# EAGLE board JKW_DIP-VGA-v1.0 (EAGLE 6.5.0)

No outline drawn. Coordinates in mm, seen from the top.
Copper layers (1*2*15*16): Top 0.035mm / dielectric 0.2mm / Route2 0.035mm / dielectric 0.2mm / Route15 0.035mm / dielectric 0.2mm / Bottom 0.035mm
Design rules "Hampoo *": minimum track width 3mil, minimum drill 8mil, track to track 3mil, track to pad 3mil, pad to pad 3mil, via to via 3mil, smd to smd 3mil, copper to edge 10mil, drill to drill 8mil, minimum pad ring 10mil, minimum via ring 8mil, stop-mask expansion 4mil, vias tented up to drill 39mil, thermal gap 10mil

## Footprints (pad centres in the part's own frame; a part is rotated, then mirrored left to right if it is on the bottom)
SOT23-BEC = smd 1 x 1.4: 1 -0.95,-1.1; 2 0.95,-1.1; 3 0,1.1
2X20CHIP_SM = drill 1.016: AP-EINT1 36.81,21.65; AP-EINT3 39.35,21.65; BAT 3.79,41.97; CHG-IN 3.79,49.59; CSICK 39.35,16.57; CSID0 36.81,11.49; CSID1 39.35,11.49; CSID2 36.81,8.95; CSID3 39.35,8.95; CSID4 36.81,6.41; CSID5 39.35,6.41; CSID6 36.81,3.87; CSID7 39.35,3.87; CSIHSYNC 36.81,14.03; CSIPCK 36.81,16.57; CSIVSYNC 39.35,14.03; FEL 36.81,41.97; GND@1 3.79,36.89; GND@2 1.25,1.33; GND@4 39.35,24.19; GND@5 39.35,1.33; GND@6 36.81,1.33; GND@7 36.81,24.19; GND@10 3.79,47.05; HPCOM 39.35,44.51; HPL 39.35,47.05; HPR 39.35,41.97; LCD-CLK 1.25,6.41; LCD-D2 1.25,29.27; LCD-D3 3.79,26.73; LCD-D4 1.25,26.73; LCD-D5 3.79,24.19; LCD-D6 1.25,24.19; LCD-D7 3.79,21.65; LCD-D10 1.25,21.65; LCD-D11 3.79,19.11; LCD-D12 1.25,19.11; LCD-D13 3.79,16.57; LCD-D14 1.25,16.57; LCD-D15 3.79,14.03; LCD-D18 1.25,14.03; LCD-D19 3.79,11.49; LCD-D20 1.25,11.49; LCD-D21 3.79,8.95; LCD-D22 1.25,8.95; LCD-D23 3.79,6.41; LCD-DE 3.79,1.33; LCD-HSYNC 3.79,3.87; LCD-VSYNC 1.25,3.87; LRADC 36.81,36.89; MICIN1 39.35,36.89; MICM 39.35,39.43; PWM0 3.79,29.27; PWRON 3.79,39.43; TS 3.79,44.51; TWI1-SCK 1.25,36.89; TWI1-SDA 1.25,39.43; TWI2-SCK 39.35,19.11; TWI2-SDA 36.81,19.11; UART1-RX 36.81,44.51; UART1-TX 36.81,47.05; VCC1V8 1.25,41.97; VCC3V3 1.25,44.51; VCC3V3@1 36.81,39.43; VCC5V@0 1.25,47.05; VCC5V@1 39.35,49.59; X1 1.25,34.35; X2 3.79,34.35; XIO-P0 36.81,34.35; XIO-P1 39.35,34.35; XIO-P2 36.81,31.81; XIO-P3 39.35,31.81; XIO-P4 36.81,29.27; XIO-P5 39.35,29.27; XIO-P6 36.81,26.73; XIO-P7 39.35,26.73; Y1 1.25,31.81; Y2 3.79,31.81 | drill 1.016 square: GND@3 1.25,49.59; GND@8 36.81,49.59
R0603_5MIL_DWS = smd 1.016 x 1.016: 1 -0.889,0; 2 0.889,0
TACTILE-SWITCH-K2-1114UA-AW = smd 1.55 x 1: 2 -2.525,0.75; 3 -2.525,-0.75; 4 2.525,-0.75; 11 2.525,0.75 | hole 0.8: 0,1.3; 0,-1.3
TSOC6 = smd 0.53 x 1.33: 1 -1.27,-1.6; 2 0,-1.6; 3 1.27,-1.6; 4 1.27,1.6; 5 0,1.6; 6 -1.27,1.6
DB15 = drill 1.016 pad 1.88: 1 -4.32,-7.62; 2 -2.03,-7.62; 3 0.26,-7.62; 4 2.55,-7.62; 5 4.84,-7.62; 6 -5.46,-5.08; 7 -3.17,-5.08; 8 -0.88,-5.08; 9 1.41,-5.08; 10 3.7,-5.08; 11 -4.32,-2.54; 12 -2.03,-2.54; 13 0.26,-2.54; 14 2.55,-2.54; 15 4.84,-2.54 | drill 3.302 pad 5.08: G1 -12.5,-5.08; G2 12.5,-5.08

## Placement (x,y rotation side)
D1  BAT54S  [SOT23-BEC]  22.48,28.57 270 bottom
D2  BAT54S  [SOT23-BEC]  22.35,36.2 270 bottom
D3  BAT54S  [SOT23-BEC]  22.35,43.81 270 bottom
D4  BAT54S  [SOT23-BEC]  22.1,20.07 180 bottom
D5  BAT54S  [SOT23-BEC]  27.05,20.07 180 bottom
J1  2X20-CHIP-HEADERS  [2X20CHIP_SM]  0,0 0 top
R1  499  [R0603_5MIL_DWS]  8.76,23.5 180 bottom
R2  1.1k  [R0603_5MIL_DWS]  8.76,26.04 180 bottom
R3  2.1k  [R0603_5MIL_DWS]  15.11,26.04 180 bottom
R4  4.3k  [R0603_5MIL_DWS]  8.76,28.57 180 bottom
R5  8.66k  [R0603_5MIL_DWS]  15.11,28.57 180 bottom
R6  499  [R0603_5MIL_DWS]  15.11,31.11 180 bottom
R7  1.1k  [R0603_5MIL_DWS]  8.76,33.66 180 bottom
R8  2.2k  [R0603_5MIL_DWS]  15.11,33.66 180 bottom
R9  4.3k  [R0603_5MIL_DWS]  8.76,36.2 180 bottom
R10  8.66K  [R0603_5MIL_DWS]  15.11,36.2 180 bottom
R11  17.4K  [R0603_5MIL_DWS]  8.76,38.73 180 bottom
R12  499  [R0603_5MIL_DWS]  15.11,38.73 180 bottom
R13  1.1k  [R0603_5MIL_DWS]  8.76,41.27 180 bottom
R14  2.1k  [R0603_5MIL_DWS]  15.11,41.27 180 bottom
R15  4.3k  [R0603_5MIL_DWS]  8.76,43.81 180 bottom
R16  8.66k  [R0603_5MIL_DWS]  15.11,43.81 180 bottom
R17  120  [R0603_5MIL_DWS]  8.76,18.29 0 bottom
R18  120  [R0603_5MIL_DWS]  8.76,20.95 0 bottom
R19  4.7k  [R0603_5MIL_DWS]  6.11,48.05 90 bottom
R20  DNP  [R0603_5MIL_DWS]  16.38,20.07 90 bottom
R21  DNP  [R0603_5MIL_DWS]  13.08,20.07 90 bottom
R22  4.7K  [R0603_5MIL_DWS]  26.04,28.7 270 bottom
R23  4.7K  [R0603_5MIL_DWS]  28.07,28.7 90 bottom
SW  TACTILE-SWITCH-434333045822SIDE_W_MOUNT  [TACTILE-SWITCH-K2-1114UA-AW]  20.32,48.39 180 bottom
U1  DS2431P  [TSOC6]  9.73,48.05 90 bottom
U$1  DB15  [DB15]  20.19,6.73 180 top

## Library data of the parts
D1-D5 J1 R1-R23 = VGA-DIP
SW = cheeper
U1 = VGA-DIP; DESCRIPTION: IC, 1024-Bit, 1-Wire EEPROM, TSOC6; FOOTPRINT: TSOC6; LINK: http://www.digikey.com/product-detail/en/DS2431P%2BT%26R/DS2431P%2BT%26RCT-ND/3647900; MFG: DIGIKEY; MFG_PN: DS2431P+T&RCT-ND; PART_TYPE: IC; PRICE: 0.98; VENDOR: MAXIM; VENDOR_PART_NUMBER: DS2431P+T&R
U$1 = SparkFun-Connectors

## Nets
1: J1.CSIVSYNC
AP-EINT1: J1.AP-EINT1
AP-EINT3: J1.AP-EINT3
BAT: J1.BAT
CSICK: J1.CSICK
CSID0: J1.CSID0
CSID1: J1.CSID1
CSID2: J1.CSID2
CSID3: J1.CSID3
CSID4: J1.CSID4
CSID5: J1.CSID5
CSID6: J1.CSID6
CSID7: J1.CSID7
CSIHSYNC: J1.CSIHSYNC
CSPICK: J1.CSIPCK
FEL: J1.FEL
GND: D1.1 D2.1 D3.1 D4.1 D5.1 J1.GND@1 J1.GND@2 J1.GND@3 J1.GND@4 J1.GND@5 J1.GND@6 J1.GND@7 J1.GND@8 J1.GND@10 SW.3 SW.4 U1.1 U$1.5 U$1.6 U$1.7 U$1.8 U$1.10
HPCOM: J1.HPCOM
HPL: J1.HPL
HPR: J1.HPR
LCD-D3: J1.LCD-D3 R16.1
LCD-D4: J1.LCD-D4 R15.1
LCD-D5: J1.LCD-D5 R14.1
LCD-D6: J1.LCD-D6 R13.1
LCD-D7: J1.LCD-D7 R12.1
LCD-D10: J1.LCD-D10 R11.1
LCD-D11: J1.LCD-D11 R10.1
LCD-D12: J1.LCD-D12 R9.1
LCD-D13: J1.LCD-D13 R8.1
LCD-D14: J1.LCD-D14 R7.1
LCD-D15: J1.LCD-D15 R6.1
LCD-D19: J1.LCD-D19 R5.1
LCD-D20: J1.LCD-D20 R4.1
LCD-D21: J1.LCD-D21 R3.1
LCD-D22: J1.LCD-D22 R2.1
LCD-D23: J1.LCD-D23 R1.1
LCD-HSYNC: D5.3 J1.LCD-HSYNC R17.2 R20.1
LCD-VSYNC: D4.3 J1.LCD-VSYNC R18.2 R21.1
LRADC: J1.LRADC
MICIN1: J1.MICIN1
MICM: J1.MICM
N$1: R17.1 U$1.13
N$2: R18.1 U$1.14
N$5: J1.LCD-D2 R19.1 U1.2
N$12: D2.3 R6.2 R7.2 R8.2 R9.2 R10.2 R11.2 U$1.2
N$13: D1.3 R1.2 R2.2 R3.2 R4.2 R5.2 U$1.1
N$19: D3.3 R12.2 R13.2 R14.2 R15.2 R16.2 U$1.3
PWRON: J1.PWRON SW.2 SW.11
SCK: J1.TWI1-SCK R23.1 U$1.15
SDA: J1.TWI1-SDA R22.1 U$1.12
TWI2-SCK: J1.TWI2-SCK
TWI2-SDA: J1.TWI2-SDA
UART1-RX: J1.UART1-RX
UART1-TX: J1.UART1-TX
VCC3V3: D1.2 D2.2 D3.2 J1.VCC3V3 J1.VCC3V3@1 R19.2 R22.2 R23.2
VCC5V: D4.2 D5.2 J1.VCC5V@0 J1.VCC5V@1 R20.2 R21.2 U$1.9
VCC-1V8: J1.VCC1V8
XIO-P0: J1.XIO-P0
XIO-P1: J1.XIO-P1
XIO-P2: J1.XIO-P2
XIO-P3: J1.XIO-P3
XIO-P4: J1.XIO-P4
XIO-P5: J1.XIO-P5
XIO-P6: J1.XIO-P6
XIO-P7: J1.XIO-P7

## Tracks (layer width: path | path; a pad name or v marks a point on that pad's centre or on a via)
GND  (21 unrouted)
LCD-D3  (1 unrouted)
LCD-D4  (1 unrouted)
LCD-D5  (1 unrouted)
LCD-D6  (1 unrouted)
LCD-D7  (1 unrouted)
LCD-D10  (1 unrouted)
LCD-D11  (1 unrouted)
LCD-D12  (1 unrouted)
LCD-D13  (1 unrouted)
LCD-D14  (1 unrouted)
LCD-D15  (1 unrouted)
LCD-D19  (1 unrouted)
LCD-D20  (1 unrouted)
LCD-D21  (1 unrouted)
LCD-D22  (1 unrouted)
LCD-D23  (1 unrouted)
LCD-HSYNC  (3 unrouted)
LCD-VSYNC  (3 unrouted)
N$1  (1 unrouted)
N$2  (1 unrouted)
N$5  (2 unrouted)
N$12  (7 unrouted)
N$13  (6 unrouted)
N$19  (6 unrouted)
PWRON  (2 unrouted)
SCK  (2 unrouted)
SDA  (2 unrouted)
VCC3V3  (7 unrouted)
VCC5V  (6 unrouted)